# Altium PCB Grabber_DIOT.PCBDOC (part 6 of 7)
Units mm, origin at the board's own origin, x right, y up, seen from the top; angles counter-clockwise.
Board outline 221.14 x 100 mm, 4 copper layers (TopLayer, MidLayer1, Internal layer GND, Bottom Layer), stack 1.607 mm thick; 234 components, 170 nets, 1025 pads, 389 vias.
Unrouted connection lines stored in the file: 2.
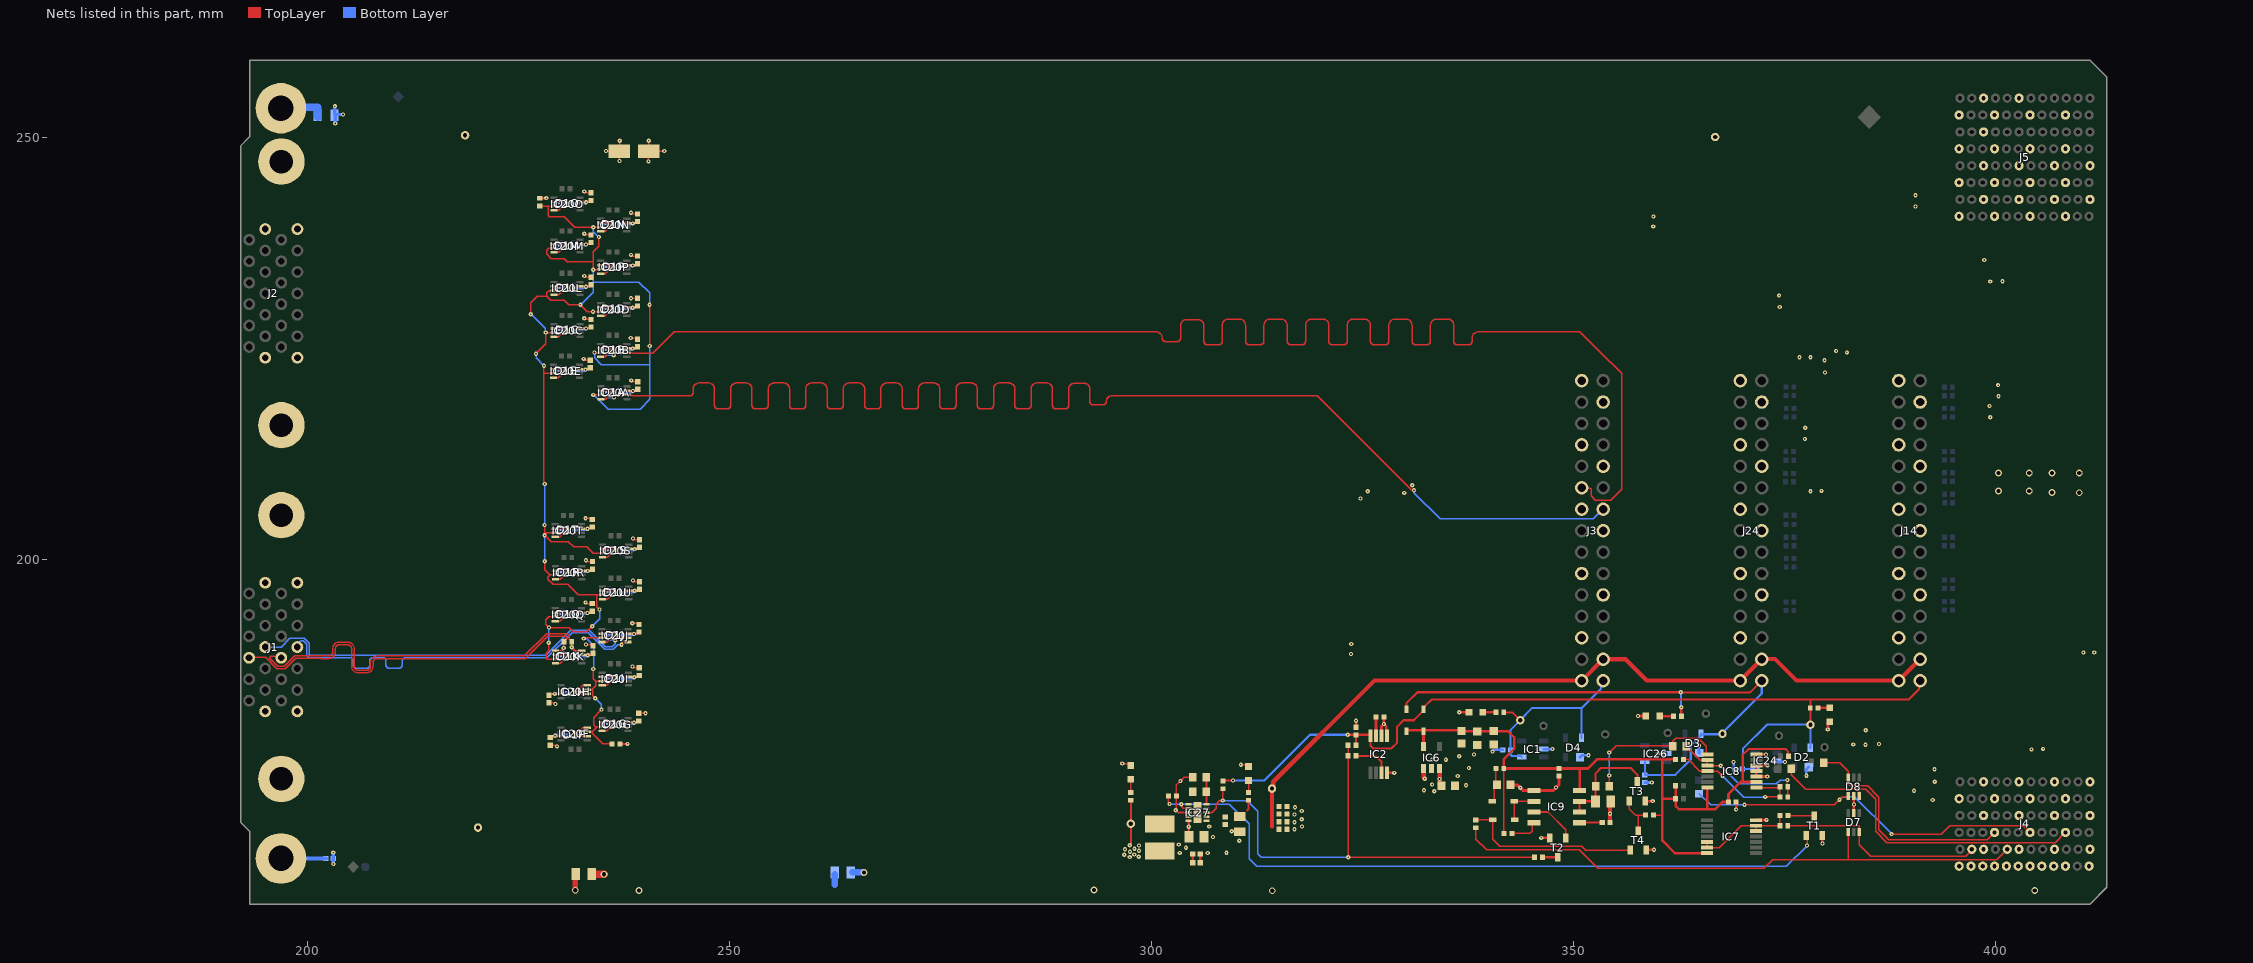
[diagram p7: the nets of this part, all layers, seen from the top]

## Via types
v1: diameter 0.5, hole 0.2, TopLayer to Bottom Layer, tented both sides, 374 vias
v2: diameter 0.8, hole 0.5, TopLayer to Bottom Layer, tented both sides, 15 vias

## Nets (pads, with @x,y where several pads share a name; then routed paths per layer and width w, separated by ;. In a path a pad name is that pad's centre, name@x,y a point inside that pad or via, vN(x,y) a via of type N, cw(c..) or ccw(c..) an arc to the next point about the centre after c; other vN are vias at no path point) (continued)
EEM_IO.LVDS_P19: D1B.1 IC20B.6 J3.11 | length 180.4
  TopLayer w0.152: v1(236.317,224.209) 236.317,224.278 236.556,224.517 IC20B.6@237.856,224.517 238.515,224.517 238.624,224.408 240.915,224.408 243.47,226.963 294.04,226.963 300.586,226.963 cw(c300.586,226.244) 301.305,226.244 ccw(c301.742,226.244) 301.742,225.807 303.053,225.807 ccw(c303.053,226.244) 303.49,226.244 303.49,227.7 cw(c304.209,227.7) 304.209,228.419 305.52,228.419 cw(c305.52,227.7) 306.239,227.7 306.239,225.876 ccw(c306.676,225.876) 306.676,225.439 307.987,225.439 ccw(c307.987,225.876) 308.424,225.876 308.424,227.768 cw(c309.143,227.768) 309.143,228.487 310.454,228.487 cw(c310.454,227.768) 311.173,227.768 311.173,225.876 ccw(c311.61,225.876) 311.61,225.439 312.92,225.439 ccw(c312.92,225.876) 313.357,225.876 313.357,227.768 cw(c314.077,227.768) 314.077,228.487 315.387,228.487 cw(c315.387,227.768) 316.107,227.768 316.107,225.876 ccw(c316.544,225.876) 316.544,225.439 317.854,225.439 ccw(c317.854,225.876) 318.291,225.876 318.291,227.768 cw(c319.01,227.768) 319.01,228.487 320.321,228.487 cw(c320.321,227.768) 321.041,227.768 321.041,225.876 ccw(c321.477,225.876) 321.477,225.439 322.788,225.439 ccw(c322.788,225.876) 323.225,225.876 323.225,227.768 cw(c323.944,227.768) 323.944,228.487 325.255,228.487 cw(c325.255,227.768) 325.974,227.768 325.974,225.876 ccw(c326.411,225.876) 326.411,225.439 327.722,225.439 ccw(c327.722,225.876) 328.159,225.876 328.159,227.768 cw(c328.878,227.768) 328.878,228.487 330.189,228.487 cw(c330.189,227.768) 330.908,227.768 330.908,225.876 ccw(c331.345,225.876) 331.345,225.439 332.656,225.439 ccw(c332.656,225.876) 333.092,225.876 333.092,227.768 cw(c333.812,227.768) 333.812,228.487 335.122,228.487 cw(c335.122,227.768) 335.842,227.768 335.842,225.876 ccw(c336.279,225.876) 336.279,225.439 337.589,225.439 ccw(c337.589,225.876) 338.026,225.876 338.026,226.244 cw(c338.746,226.244) 338.746,226.963 338.963,226.963 350.776,226.963 353.132,224.607 353.166,224.607 355.735,222.038 355.735,208.308 354.463,207.036 352.624,207.036 352.112,207.548 352.112,208.353 352.023,208.442 351.386,208.442 J3.11@351.246,208.582
  Bottom Layer w0.152: D1B.1@235.516,224.342 235.649,224.209 v1(236.317,224.209)
EEM_IO.LVDS_P20: D1A.1 IC20A.6 J3.14 | length 180.2
  TopLayer w0.152: v1(236.352,219.185) 236.352,219.254 236.591,219.493 IC20A.6@237.891,219.493 237.937,219.446 238.438,219.446 238.5,219.385 245.112,219.385 245.336,219.385 ccw(c245.336,219.771) 245.722,219.771 245.722,220.228 cw(c246.403,220.228) 246.403,220.909 247.561,220.909 cw(c247.561,220.228) 248.242,220.228 248.242,218.247 ccw(c248.628,218.247) 248.628,217.861 249.786,217.861 ccw(c249.786,218.247) 250.172,218.247 250.172,220.228 cw(c250.853,220.228) 250.853,220.909 252.011,220.909 cw(c252.011,220.228) 252.691,220.228 252.691,218.247 ccw(c253.077,218.247) 253.077,217.861 254.236,217.861 ccw(c254.236,218.247) 254.622,218.247 254.622,220.228 cw(c255.302,220.228) 255.302,220.909 256.461,220.909 cw(c256.461,220.228) 257.141,220.228 257.141,218.247 ccw(c257.527,218.247) 257.527,217.861 258.686,217.861 ccw(c258.686,218.247) 259.072,218.247 259.072,220.228 cw(c259.752,220.228) 259.752,220.909 260.91,220.909 cw(c260.91,220.228) 261.591,220.228 261.591,218.247 ccw(c261.977,218.247) 261.977,217.861 263.135,217.861 ccw(c263.135,218.247) 263.521,218.247 263.521,220.228 cw(c264.202,220.228) 264.202,220.909 265.36,220.909 cw(c265.36,220.228) 266.041,220.228 266.041,218.247 ccw(c266.427,218.247) 266.427,217.861 267.585,217.861 ccw(c267.585,218.247) 267.971,218.247 267.971,220.228 cw(c268.652,220.228) 268.652,220.909 269.81,220.909 cw(c269.81,220.228) 270.491,220.228 270.491,218.247 ccw(c270.877,218.247) 270.877,217.861 272.035,217.861 ccw(c272.035,218.247) 272.421,218.247 272.421,220.228 cw(c273.102,220.228) 273.102,220.909 274.26,220.909 cw(c274.26,220.228) 274.941,220.228 274.941,218.247 ccw(c275.327,218.247) 275.327,217.861 276.485,217.861 ccw(c276.485,218.247) 276.871,218.247 276.871,220.228 cw(c277.552,220.228) 277.552,220.909 278.71,220.909 cw(c278.71,220.228) 279.39,220.228 279.39,218.247 ccw(c279.777,218.247) 279.777,217.861 280.935,217.861 ccw(c280.935,218.247) 281.321,218.247 281.321,220.228 cw(c282.001,220.228) 282.001,220.909 283.16,220.909 cw(c283.16,220.228) 283.84,220.228 283.84,218.247 ccw(c284.226,218.247) 284.226,217.861 285.385,217.861 ccw(c285.385,218.247) 285.771,218.247 285.771,220.228 cw(c286.451,220.228) 286.451,220.909 287.61,220.909 cw(c287.61,220.228) 288.29,220.228 288.29,218.247 ccw(c288.676,218.247) 288.676,217.861 289.834,217.861 ccw(c289.834,218.247) 290.221,218.247 290.221,220.188 cw(c290.901,220.188) 290.901,220.868 292.059,220.868 cw(c292.059,220.188) 292.74,220.188 292.74,218.704 ccw(c293.126,218.704) 293.126,218.318 294.284,218.318 ccw(c294.284,218.704) 294.67,218.704 cw(c295.351,218.704) 295.351,219.385 297.388,219.385 319.662,219.385 330.804,208.243 330.998,208.243 v1@331.018,208.263
  Bottom Layer w0.152: D1A.1@235.551,219.318 235.684,219.185 v1(236.352,219.185) ; v1@331.178,208.072 331.169,208.063 331.169,207.864 334.219,204.814 352.39,204.814 353.529,205.952 J3.14@353.55,205.952
  other v1: 331.135,208.203
GND: B5.1 B7.1 B9.1 C1.2 C2.1 C3.1 C9.1 C10.1 C11.1 C12.1 C13.1 C14.1 C15.1 C16.1 C17.1 C47A.1 C47B.1 C47C.1 C47D.1 C47E.1 C47F.1 C47G.1 C47H.1 C47I.1 C47J.1 C47K.1 C47L.1 C47M.1 C47N.1 C47O.1 C47P.1 C47Q.1 C47R.1 C47S.1 C47T.1 C47U.1 C58.1 C59.1 C62.2 C64.1 C65.1 C66.1 C67.1 C68.1 D1A.2 D1B.2 D1C.2 D1D.2 D1E.2 D1F.2 D1G.2 D1H.2 D1I.2 D1J.2 D1K.2 D1L.2 D1M.2 D1N.2 D1O.2 D1P.2 D1Q.2 D1R.2 D1S.2 D1T.2 D1U.2 D2.1 D3.1 D4.1 D7.2 D8.2 IC1.2 IC2.4 IC2.5 IC2.6 IC6.2 IC7.7 IC8.3 IC8.4 IC8.5 IC8.7 IC9.1 IC20A.2 IC20A.4 IC20B.2 IC20B.4 IC20C.2 IC20C.4 IC20D.2 IC20D.4 IC20E.2 IC20E.4 IC20F.2 IC20F.4 IC20G.2 IC20G.4 IC20H.2 IC20H.4 IC20I.2 IC20I.4 IC20J.2 IC20J.4 IC20K.2 IC20K.4 IC20L.2 IC20L.4 IC20M.2 IC20M.4 IC20N.2 IC20N.4 IC20O.2 IC20O.4 IC20P.2 IC20P.4 IC20Q.2 IC20Q.4 IC20R.2 IC20R.4 IC20S.2 IC20S.4 IC20T.2 IC20T.4 IC20U.2 IC20U.4 IC24.2 IC26.2 IC27.1 IC27.6 IC27.11 J1.1 J1.13 J1.14 J1.26 J1.27 J1.28 J2.1 J2.13 J2.14 J2.26 J2.27 J2.28 J3.1 J3.4 J3.7 J3.10 J3.13 J3.16 J3.19 J3.22 J3.25 J4.A2 J4.A4 J4.A6 J4.C1 J4.C5 J4.D2 J4.D4 J4.D6 J4.F1 J4.F5 J4.G2 J4.G4 J4.G6 J4.I1 J4.I5 J4.J2 J4.J4 J4.J6 J4.L1 J4.L5 J5.A2 J5.A4 J5.C1 J5.C3 J5.C5 J5.C7 J5.D2 J5.D4 J5.F1 J5.F3 J5.F5 J5.F7 J5.G2 J5.G4 J5.G8 J5.I1 J5.I3 J5.I5 J5.I7 J5.J2 J5.J4 J5.J6 J5.J8 J5.L1 J5.L3 J5.L5 J5.L7 J14.1 J14.4 J14.7 J14.10 J14.13 J14.16 J14.19 J14.22 J14.25 J24.1 J24.4 J24.7 J24.10 J24.13 J24.16 J24.19 J24.22 J24.25 LD1.1 LD5.1 LD6.1 LD7.1 LD8.1 R5.2 R6.2 R68.1 R122.1 T1.2 T2.2 T3.2 T4.2 | length 154.4
  TopLayer w0.152: C47H.1@228.643,183.014 229.4,183.014 229.425,182.989 v1(229.425,182.865) ; C47F.1@228.799,177.999 229.556,177.999 229.581,177.974 v1(229.581,177.85) ; IC20E.4@229.166,221.542 229.716,221.542 v1(230.566,222.392) 230.488,222.392 230.303,222.576 229.201,222.576 IC20E.2@229.166,222.542 ; IC20C.4@229.231,226.367 229.781,226.367 v1(230.631,227.217) 230.556,227.217 230.368,227.405 229.269,227.405 IC20C.2@229.231,227.367 ; IC20L.4@229.231,231.367 229.781,231.367 v1(230.631,232.217) 230.481,232.367 IC20L.2@229.231,232.367 ; IC20M.4@229.231,236.374 229.781,236.374 v1(230.631,237.224) 230.537,237.224 230.349,237.412 229.269,237.412 IC20M.2@229.231,237.374 ; IC20O.4@229.231,241.367 229.781,241.367 v1(230.631,242.217) 230.559,242.217 230.368,242.408 229.272,242.408 IC20O.2@229.231,242.367 ; IC20Q.4@229.391,192.692 229.941,192.692 v1(230.791,193.542) 230.712,193.542 230.528,193.725 229.425,193.725 IC20Q.2@229.391,193.692 ; IC20T.4@229.391,202.666 229.941,202.666 v1(230.791,203.516) 230.716,203.516 230.528,203.704 229.429,203.704 IC20T.2@229.391,203.666 ; IC20K.4@229.426,187.693 229.976,187.693 v1(230.826,188.543) 230.735,188.543 230.563,188.715 229.448,188.715 IC20K.2@229.426,188.693 ; IC20R.4@229.426,197.675 229.976,197.675 v1(230.826,198.525) 230.75,198.525 230.563,198.711 229.463,198.711 IC20R.2@229.426,198.675 ; v1(232.759,223.766) 232.759,223.642 232.784,223.617 C47E.1@233.541,223.617 ; v1(232.824,228.591) 232.824,228.467 232.849,228.442 C47C.1@233.606,228.442 ; v1(232.824,233.591) 232.824,233.467 232.849,233.442 C47L.1@233.606,233.442 ; v1(232.824,238.598) 232.824,238.474 232.849,238.449 C47M.1@233.606,238.449 ; v1(232.824,243.591) 232.824,243.467 232.849,243.442 C47O.1@233.606,243.442 ; v1(232.984,194.916) 232.984,194.792 233.009,194.767 C47Q.1@233.766,194.767 ; v1(232.984,204.89) 233.616,204.89 C47T.1@233.766,204.741 ; v1(233.019,189.917) 233.043,189.892 233.676,189.892 C47K.1@233.801,189.768 ; v1(233.019,199.899) 233.019,199.775 233.044,199.75 C47R.1@233.801,199.75 ; IC20F.2@233.174,179.074 233.122,179.022 232.037,179.022 231.835,179.224 v1(231.774,179.224) 232.624,180.074 IC20F.4@233.174,180.074 ; IC20H.2@233.174,184.074 233.122,184.021 232.037,184.021 231.835,184.224 v1(231.774,184.224) 232.624,185.074 IC20H.4@233.174,185.074 ; IC20B.4@234.756,224.017 235.306,224.017 v1(236.156,224.867) 236.102,224.867 235.893,225.076 234.815,225.076 IC20B.2@234.756,225.017 ; IC20D.4@234.766,228.867 235.316,228.867 v1(236.166,229.717) 236.091,229.717 235.903,229.905 234.805,229.905 IC20D.2@234.766,229.867 ; IC20P.4@234.766,233.867 235.316,233.867 v1(236.166,234.717) 236.072,234.717 235.905,234.883 234.782,234.883 IC20P.2@234.766,234.867 ; IC20N.4@234.766,238.867 235.316,238.867 v1(236.166,239.717) 236.101,239.717 235.903,239.915 234.814,239.915 IC20N.2@234.766,239.867 ; IC20A.4@234.791,218.993 235.341,218.993 v1(236.191,219.843) 236.113,219.843 235.928,220.027 234.826,220.027 IC20A.2@234.791,219.993 ; IC20G.4@234.916,179.692 235.466,179.692 v1(236.316,180.542) 236.234,180.542 236.053,180.723 234.948,180.723 IC20G.2@234.916,180.692 ; IC20J.4@234.923,190.218 235.473,190.218 v1(236.323,191.068) 236.246,191.068 236.06,191.254 234.959,191.254 IC20J.2@234.923,191.218 ; IC20I.4@234.951,185.085 235.501,185.085 v1(236.351,185.935) 236.28,185.935 236.088,186.127 234.993,186.127 IC20I.2@234.951,186.085 ; IC20U.4@235.001,195.292 235.551,195.292 v1(236.401,196.142) 236.343,196.142 236.138,196.347 235.056,196.347 IC20U.2@235.001,196.292 ; IC20S.4@235.001,200.258 235.551,200.258 v1(236.401,201.108) 236.326,201.108 236.138,201.296 235.04,201.296 IC20S.2@235.001,201.258 ; v1(238.338,226.229) 238.993,226.229 C47B.1@239.131,226.092 ; v1(238.349,230.957) 238.576,230.957 238.591,230.942 C47D.1@239.141,230.942 ; v1(238.359,236.091) 238.359,235.967 238.384,235.942 C47P.1@239.141,235.942 ; v1(238.359,241.091) 238.359,240.967 238.384,240.942 C47N.1@239.141,240.942 ; v1(238.384,221.217) 238.384,221.093 238.409,221.068 C47A.1@239.166,221.068 ; v1(238.516,192.442) 239.149,192.442 C47J.1@239.298,192.293 ; v1(238.544,187.309) 238.544,187.185 238.569,187.16 C47I.1@239.326,187.16 ; v1(238.594,197.516) 238.594,197.392 238.619,197.367 C47U.1@239.376,197.367 ; v1(238.594,202.482) 238.594,202.358 238.619,202.333 C47S.1@239.376,202.333 ; C47G.1@239.291,181.767 239.299,181.775 v1(240.088,181.775) ; v1(240.423,247.169) C62.2@240.423,248.328 ; C62.2@240.466,248.413 v1(240.466,249.606) ; C62.2@240.487,248.392 v1(242.287,248.392) ; v1(296.563,175.813) 297.362,175.813 LD6.1@297.582,175.594 ; v1(310.626,175.685) 311.304,175.685 LD5.1@311.544,175.445
  TopLayer w0.305: C59.1@305.821,164.051 C65.1@305.821,165.115 ; C2.1@324.273,180.112 v1(324.274,180.876) ; IC2.6@327.282,179.107 327.289,179.114 327.289,180.239 327.558,180.508 v1(327.57,180.508) ; R68.1@327.57,181.318 v1(327.57,180.508) ; IC2.4@327.932,174.707 327.934,174.709 v1(328.787,174.709) ; IC2.5@327.932,179.107 327.859,179.18 327.859,180.232 327.583,180.508 v1(327.57,180.508) ; v1(336.501,181.893) 336.505,181.897 337.638,181.897 LD7.1@337.642,181.9 ; v1(346.207,167.007) T2.2@347.207,167.007 ; v1(357.68,181.459) 357.692,181.447 LD8.1@358.612,181.447 ; T3.2@358.574,171.365 v1(359.437,171.365) ; T4.2@358.657,165.557 358.712,165.612 v1(359.568,165.612) ; C17.1@369.27,171.245 369.307,171.207 v1(369.307,170.372) ; IC8.7@371.707,176.882 371.716,176.891 372.841,176.891 v1(372.85,176.9) ; v1(373.007,174.282) IC8.3@371.707,174.282 IC8.4@371.707,174.932 371.707,175.532 371.732,175.557 IC8.5@371.707,175.582 371.717,175.592 373.029,175.592 v1(373.039,175.602) ; T1.2@379.517,167.311 379.517,166.948 379.526,166.939 379.526,166.348 v1(379.535,166.338) ; D7.2@383.257,169.932 D8.2@383.257,171.957
  TopLayer w0.381: C15.1@342.558,173.281 343.388,173.281 344.063,172.606 347.606,172.606 348.333,173.333 C14.1@348.333,174.33 ; IC7.7@371.657,169.107 371.675,169.125 372.9,169.125 v1(372.918,169.142) ; v1(380.157,179.867) 380.157,179.899 380.198,179.94 380.198,180.567 LD1.1@380.407,180.777
  TopLayer w0.508: C16.1@354.357,168.807 354.364,168.814 v1(354.364,169.871) ; v1@354.359,169.876 354.359,171.209 C13.1@354.457,171.307
  Bottom Layer w0.152: D1E.2@229.926,222.367 230.541,222.367 v1(230.566,222.392) ; D1C.2@229.991,227.192 230.606,227.192 v1(230.631,227.217) ; D1L.2@229.991,232.192 230.606,232.192 v1(230.631,232.217) ; D1M.2@229.991,237.199 230.606,237.199 v1(230.631,237.224) ; D1O.2@229.991,242.192 230.606,242.192 v1(230.631,242.217) ; D1Q.2@230.151,193.517 230.766,193.517 v1(230.791,193.542) ; D1T.2@230.151,203.491 230.766,203.491 v1(230.791,203.516) ; D1K.2@230.186,188.518 230.801,188.518 v1(230.826,188.543) ; D1R.2@230.186,198.5 230.801,198.5 v1(230.826,198.525) ; v1(231.774,179.224) 231.799,179.249 D1F.2@232.414,179.249 ; v1(231.774,184.224) 231.799,184.249 D1H.2@232.414,184.249 ; D1B.2@235.516,224.842 236.131,224.842 v1(236.156,224.867) ; D1D.2@235.526,229.692 236.141,229.692 v1(236.166,229.717) ; D1P.2@235.526,234.692 236.141,234.692 v1(236.166,234.717) ; D1N.2@235.526,239.692 236.141,239.692 v1(236.166,239.717) ; D1A.2@235.551,219.818 236.166,219.818 v1(236.191,219.843) ; D1G.2@235.676,180.517 236.291,180.517 v1(236.316,180.542) ; D1J.2@235.683,191.043 236.298,191.043 v1(236.323,191.068) ; D1I.2@235.711,185.91 236.326,185.91 v1(236.351,185.935) ; D1U.2@235.761,196.117 236.376,196.117 v1(236.401,196.142) ; D1S.2@235.761,201.083 236.376,201.083 v1(236.401,201.108)
  Bottom Layer w0.305: v1(340.433,177.231) 340.635,177.433 C3.1@341.656,177.433 ; IC1.2@346.507,177.531 v1(347.532,177.531) ; D4.1@350.807,176.558 351.043,176.795 v1(351.807,176.795) ; C64.1@358.492,173.57 358.497,173.574 v1(359.317,173.574) ; v1(360.011,176.999) 360.014,177.002 361.088,177.002 IC26.2@361.092,177.006 ; v1(364.906,177.956) 364.906,177.117 D3.1@364.956,177.067 ; v1(369.004,175.992) 369.042,175.955 369.042,175.34 369.019,175.317 368.997,175.317 C58.1@369.132,175.182 ; IC24.2@374.143,176.133 374.23,176.046 375.066,176.046 v1(375.103,176.009) ; v1(377.631,174.371) 377.631,175.134 D2.1@377.892,175.395
  Bottom Layer w0.381: v1(203.087,165.261) C1.2@203.087,164.579 203.092,164.574 203.092,163.92 v1(203.097,163.915) ; R5.2@203.27,252.757 203.25,252.777 203.25,253.699 v1(203.27,253.719) ; v1(203.306,251.659) R5.2@203.306,252.71 ; R5.2@203.311,252.716 v1(204.227,252.716)
  Bottom Layer w0.762: R6.2@264.596,162.916 v2(265.963,162.916)
  other v1: 306.691,165.207 308.907,165.257 310.432,166.657 307.332,167.107 309.532,167.782 306.87,168.341 383.268,170.956 392.607,171.507 390.382,172.582 343.725,172.944 347.969,172.97 337.307,173.257 392.832,173.667 336.332,174.332 392.814,175.137 337.638,175.282 333.262,176.261 334.917,176.267 336.507,176.682 338.257,176.881 404.301,177.497 405.681,177.557 384.626,178.037 383.189,178.089 386.232,178.132 384.662,179.751 323.676,188.791 410.455,188.964 411.74,188.964 323.712,189.979 324.8,207.216 329.988,207.889 325.663,208.08 378.131,208.077 379.409,208.126 330.94,208.789 377.455,214.28 377.502,215.605 399.428,216.861 399.345,218.188 400.39,219.338 400.352,220.656 379.837,222.156 379.777,223.604 376.82,223.95 378.132,223.958 382.43,224.535 381.154,224.708 374.465,229.922 374.402,231.262 399.408,232.92 400.875,232.965 398.698,235.492 359.477,239.466 359.505,240.644 390.555,241.829 390.569,243.144
  other v2: 406.72,207.928 409.956,207.912 400.406,208.105 404.048,208.105 400.406,210.233 404.048,210.233 406.72,210.233 409.956,210.233
NetC13_2: C13.2 IC9.6 IC9.7 R62.2 T3.3 | length 12.9
  TopLayer w0.254: IC9.6@350.757,170.072 IC9.7@350.757,171.342 352.622,171.342 C13.2@352.657,171.307 352.657,174.657 353.282,175.282 356.807,175.282 357.607,174.482 T3.3@357.607,173.682
NetC15_2: C15.2 D9.1 R71.2 | length 4.2
  TopLayer w0.152: D9.1@340.433,171.349 340.459,171.349 340.633,171.523 340.633,172.956 C15.2@340.958,173.281 340.836,173.403 R71.2@340.836,175.231
NetC16_2: C16.2 IC9.5 | length 2.7
  TopLayer w0.254: IC9.5@350.757,168.802 350.772,168.817 353.442,168.817 C16.2@353.457,168.832
NetD6_2: D6.2 D9.2 IC9.2 | length 4.5
  TopLayer w0.152: D6.2@343.058,169.156 343.033,169.181 D9.2@343.033,171.349 343.04,171.342 IC9.2@345.357,171.342
NetD7_4: D7.4 J4.H2 R36.2 | length 70
  TopLayer w0.152: R36.2@338.467,168.21 338.467,166.847 339.732,165.582 350.732,165.582 352.932,163.382 371.507,163.382 372.607,163.382 373.657,164.432 382.63,164.432 400.207,164.432 J4.H2@401.432,165.657
  TopLayer w0.203: 382.607,164.456 D7.4@382.607,167.732
NetD7_6: D7.6 J4.K2 R46.2 | length 25
  TopLayer w0.152: R46.2@375.431,168.461 383.818,168.461 383.907,168.372 D7.6@383.907,167.732 383.924,167.716 383.924,166.197 385.284,164.836 396.501,164.836 397.232,165.568 J4.K2@397.232,165.657
NetD8_1: D8.1 J4.F3 R11.1 | length 44
  TopLayer w0.152: v1(370.288,170.936) 370.291,170.933 380.916,170.933 381.51,171.528 v1(381.568,171.528) ; v1@381.558,171.517 381.948,171.907 382.557,171.907 D8.1@382.607,171.957 ; v1(387.732,167.457) 393.613,167.457 394.598,168.443 403.347,168.443 J4.F3@404.132,167.657
  Bottom Layer w0.152: R11.1@364.907,172.257 364.957,172.257 366.279,170.936 v1(370.288,170.936) ; v1(381.568,171.528) 381.948,171.907 383.332,171.907 387.732,167.507 v1(387.732,167.457)
NetD8_3: D8.3 J4.C3 R10.1 | length 40
  TopLayer w0.152: R10.1@375.832,175.182 375.832,174.498 377.583,172.747 383.907,172.747 ; D8.3@383.907,171.957 383.907,172.747 ; J4.C3@408.332,167.657 407.127,166.452 387.156,166.452 385.828,167.78 385.828,171.592 384.673,172.747 383.907,172.747
NetD8_6: D8.6 J4.I3 R39.1 | length 27.4
  TopLayer w0.152: R39.1@379.782,175.907 381.607,175.907 382.607,174.907 D8.6@382.607,174.157 382.607,173.448 382.848,173.207 384.873,173.207 386.232,171.848 386.232,167.957 387.407,166.782 399.057,166.782 J4.I3@399.932,167.657
NetIC2_3: IC2.3 R67.1 | length 4.6
  TopLayer w0.254: R67.1@324.277,176.73 326.588,176.73 327.282,176.036 IC2.3@327.282,174.707
NetIC2_7: IC2.7 R68.2 | length 2.2
  TopLayer w0.305: R68.2@326.63,181.318 326.631,181.317 IC2.7@326.632,179.107 IC2.7@326.632,179.107
NetIC8_1: IC8.1 IC8.11 R50.1 R52.1 R53.1 | length 17
  TopLayer w0.152: 363.407,176.301 363.626,176.301 364.994,174.932 367.132,174.932 v1(367.682,174.382) ; IC8.1@371.707,172.982 371.722,172.967 374.397,172.967 R53.1@374.487,173.057 R52.1@374.487,171.85 R52.1@374.487,171.84 ; v1(372.768,171.867) 374.46,171.867 R52.1@374.487,171.84 ; R52.1@374.487,171.822 R52.1@374.487,171.84 ; R52.1@374.492,171.835 R52.1@374.487,171.84
  Bottom Layer w0.152: v1(367.682,174.382) 370.214,171.85 v1@372.768,171.85
NetIC8_8: IC8.8 R55.1 R62.1 | length 18.1
  TopLayer w0.152: v1(354.282,177.118) 355.097,177.932 361.732,177.932 R55.1@361.807,177.857 361.807,177.932 361.807,178.482 362.157,178.832 364.807,178.832 365.768,177.872 365.768,177.022 IC8.8@365.907,176.882
  TopLayer w0.203: R62.1@354.256,173.106 354.282,173.132 v1(354.282,174.407)
  Bottom Layer w0.203: v1(354.282,174.407) v1(354.282,177.118)
NetIC8_9: IC8.9 IC8.10 R52.2 R53.2 R55.2 | length 16.5
  TopLayer w0.152: R55.2@363.407,177.857 363.407,177.807 363.781,177.433 363.831,177.433 365.032,176.232 IC8.9@365.907,176.232 IC8.10@365.907,175.582 365.92,175.569 367.465,175.569 v1(367.479,175.556) ; v1(375.38,173.867) 375.368,173.855 375.368,173.116 R53.2@375.427,173.057 R52.2@375.427,171.85
  TopLayer w0.203: R52.2@375.564,172.035 R52.2@375.603,172.035
  Bottom Layer w0.152: v1(367.479,175.556) 369.627,173.407 374.075,173.407 374.534,173.867 v1(375.38,173.867)
NetIC9_4: IC9.4 R63.1 | length 3.6
  TopLayer w0.152: R63.1@342.756,167.532 344.872,167.532 345.147,167.807 345.147,168.592 IC9.4@345.357,168.802
NetIC27_5: IC27.5 R121.1 R122.2 | length 3.2
  TopLayer w0.254: R121.1@306.532,174.207 R122.2@306.532,172.499 306.54,172.491 IC27.5@306.54,171.015
NetIC27_9: IC27.9 L2.1
NetLD1_2: LD1.2 R7.2 | length 1.4
  TopLayer w0.254: R7.2@379.027,182.402 379.052,182.427 LD1.2@380.407,182.427
NetLD5_2: LD5.2 R1.1 | length 1.4
  TopLayer w0.152: R1.1@311.533,172.37 LD5.2@311.533,173.807
NetLD6_2: LD6.2 R2.2 | length 1.5
  TopLayer w0.152: R2.2@297.585,172.402 LD6.2@297.585,173.947
NetLD7_2: LD7.2 R3.2 | length 1.5
  TopLayer w0.254: LD7.2@339.292,181.9 R3.2@340.767,181.9
NetLD8_2: LD8.2 R4.2 | length 1.9
  TopLayer w0.152: LD8.2@360.018,181.447 LD8.2@360.262,181.447
  TopLayer w0.254: LD8.2@360.262,181.447 360.294,181.416 R4.2@361.875,181.416
NetR48_1: R48.1 T1.3 | length 3.1
  TopLayer w0.152: R48.1@375.438,169.649 378.529,169.649 T1.3@378.567,169.611
NetR61_2: R61.2 T2.3 | length 1.8
  TopLayer w0.305: R61.2@346.377,164.707 T2.3@348.157,164.707
NetR64_1: R64.1 T3.1 T4.3 | length 5
  TopLayer w0.203: T3.1@356.657,171.382 356.657,170.432 357.382,169.707 357.707,169.707 ; T4.3@357.707,167.857 357.707,169.707 ; R64.1@358.562,169.707 357.707,169.707
P3V3: B10.1 C47A.2 C47B.2 C47C.2 C47D.2 C47E.2 C47F.2 C47G.2 C47H.2 C47I.2 C47J.2 C47K.2 C47L.2 C47M.2 C47N.2 C47O.2 C47P.2 C47Q.2 C47R.2 C47S.2 C47T.2 C47U.2 C59.2 C62.1 C65.2 C66.2 D1A.5 D1B.5 D1C.5 D1D.5 D1E.5 D1F.5 D1G.5 D1H.5 D1I.5 D1J.5 D1K.5 D1L.5 D1M.5 D1N.5 D1O.5 D1P.5 D1Q.5 D1R.5 D1S.5 D1T.5 D1U.5 IC20A.7 IC20B.7 IC20C.7 IC20D.7 IC20E.7 IC20F.7 IC20G.7 IC20H.7 IC20I.7 IC20J.7 IC20K.7 IC20L.7 IC20M.7 IC20N.7 IC20O.7 IC20P.7 IC20Q.7 IC20R.7 IC20S.7 IC20T.7 IC20U.7 IC27.8 IC27.10 L2.2 R2.1 R8.1 R9.1 R65.2 R121.2 | length 82.2
  TopLayer w0.152: IC20C.7@232.331,227.367 232.332,227.368 233.028,227.368 v1(233.029,227.369) 233.428,227.369 233.431,227.367 C47C.2@233.606,227.542 ; v1(235.404,248.392) C62.1@236.987,248.392 v1(236.987,247.209) ; C62.1@237.024,248.428 v1(237.024,249.606)
  TopLayer w0.203: R65.2@302.977,171.957 302.951,171.931 302.951,170.327 v1(302.907,170.283) 302.907,170.276 303.174,170.009 IC27.8@304.434,170.009 ; R65.2@302.982,171.957 302.982,173.268 303.922,174.207 R121.2@304.932,174.207
  TopLayer w0.254: R8.1@227.543,242.803 228.291,242.803 v1(228.305,242.817) ; C47H.2@228.643,183.914 228.802,184.073 v1(229.327,184.073) IC20H.7@230.039,184.074 ; C47F.2@228.799,178.899 228.974,179.074 228.974,179.069 228.982,179.061 229.314,179.061 v1(229.361,179.108) 229.379,179.091 230.057,179.091 IC20F.7@230.074,179.074 ; IC20E.7@232.266,222.542 232.289,222.519 232.944,222.519 v1(232.967,222.496) 233.014,222.543 233.365,222.543 233.366,222.542 C47E.2@233.541,222.717 ; IC20L.7@232.331,232.367 232.354,232.344 233.009,232.344 v1(233.032,232.321) 233.079,232.368 233.43,232.368 233.431,232.367 C47L.2@233.606,232.542 ; IC20M.7@232.331,237.374 232.354,237.351 233.009,237.351 v1(233.032,237.328) 233.079,237.375 233.43,237.375 233.431,237.374 C47M.2@233.606,237.549 ; IC20O.7@232.331,242.367 232.348,242.349 233.026,242.349 v1(233.043,242.332) 233.09,242.379 233.423,242.379 233.431,242.371 233.431,242.367 C47O.2@233.606,242.542 ; IC20Q.7@232.491,193.692 233.591,193.692 C47Q.2@233.766,193.867 ; IC20T.7@232.491,203.666 232.508,203.648 233.186,203.648 v1(233.203,203.631) 233.25,203.678 233.583,203.678 233.591,203.67 233.591,203.666 C47T.2@233.766,203.841 ; IC20K.7@232.526,188.693 232.543,188.675 233.221,188.675 v1(233.238,188.658) 233.285,188.705 233.662,188.705 233.801,188.844 C47K.2@233.801,188.868 ; IC20R.7@232.526,198.675 232.543,198.657 233.221,198.657 v1(233.238,198.64) 233.285,198.687 233.618,198.687 233.626,198.679 233.626,198.675 C47R.2@233.801,198.85 ; R9.1@237.036,178.147 v1(237.957,178.147) ; IC20B.7@237.856,225.017 237.873,224.999 238.551,224.999 v1(238.568,224.982) 238.615,225.029 238.948,225.029 238.956,225.021 238.956,225.017 C47B.2@239.131,225.192 ; IC20D.7@237.866,229.867 237.883,229.849 238.561,229.849 v1(238.578,229.832) 238.625,229.879 238.958,229.879 238.966,229.871 238.966,229.867 C47D.2@239.141,230.042 ; IC20P.7@237.866,234.867 237.889,234.844 238.544,234.844 v1(238.567,234.821) 238.614,234.868 238.965,234.868 238.966,234.867 C47P.2@239.141,235.042 ; IC20N.7@237.866,239.867 237.889,239.844 238.544,239.844 v1(238.567,239.821) 238.614,239.868 238.965,239.868 238.966,239.867 C47N.2@239.141,240.042 ; IC20A.7@237.891,219.993 237.908,219.975 238.586,219.975 v1(238.603,219.958) 238.65,220.005 238.983,220.005 238.991,219.997 238.991,219.993 C47A.2@239.166,220.168 ; IC20G.7@238.016,180.692 238.039,180.669 238.694,180.669 v1(238.717,180.646) 238.764,180.693 239.115,180.693 239.116,180.692 C47G.2@239.291,180.867 ; IC20J.7@238.023,191.218 238.046,191.195 238.701,191.195 v1(238.724,191.172) 238.771,191.219 239.122,191.219 239.123,191.218 C47J.2@239.298,191.393 ; IC20I.7@238.051,186.085 238.074,186.062 238.729,186.062 v1(238.752,186.039) 238.799,186.086 239.15,186.086 239.151,186.085 C47I.2@239.326,186.26 ; IC20U.7@238.101,196.292 238.105,196.287 238.791,196.287 v1(238.795,196.283) 238.842,196.33 239.193,196.33 239.201,196.322 239.201,196.292 C47U.2@239.376,196.467 ; IC20S.7@238.101,201.258 238.118,201.24 238.796,201.24 v1(238.813,201.223) 238.86,201.27 239.193,201.27 239.201,201.262 239.201,201.258 C47S.2@239.376,201.433 ; v1(297.457,166.132) 297.457,166.199 297.585,166.327 R2.1@297.585,171.462 ; C59.2@304.921,164.051 C65.2@304.921,165.115
  TopLayer w0.305: C66.2@304.44,167.657 IC27.10@304.44,169.015
  TopLayer w0.381: C66.2@304.44,167.657 304.455,167.642 304.455,167.148 C66.2@304.471,167.133
  Bottom Layer w0.152: D1C.5@231.571,227.192 232.88,227.192 233.029,227.341 v1(233.029,227.369)
  Bottom Layer w0.254: v1(229.327,184.073) 229.374,184.121 229.957,184.121 230.085,184.249 D1H.5@230.834,184.249 ; v1(229.361,179.108) 229.502,179.249 D1F.5@230.834,179.249 ; D1E.5@231.506,222.367 232.838,222.367 v1(232.967,222.496) ; D1L.5@231.571,232.192 232.903,232.192 v1(233.032,232.321) ; D1M.5@231.571,237.199 232.903,237.199 v1(233.032,237.328) ; D1O.5@231.571,242.192 232.903,242.192 v1(233.043,242.332) ; D1Q.5@231.731,193.517 233.063,193.517 v1(233.203,193.657) ; D1T.5@231.731,203.491 233.063,203.491 v1(233.203,203.631) ; D1K.5@231.766,188.518 233.098,188.518 v1(233.238,188.658) ; D1R.5@231.766,198.5 233.098,198.5 v1(233.238,198.64) ; D1B.5@237.096,224.842 238.428,224.842 v1(238.568,224.982) ; D1D.5@237.106,229.692 238.438,229.692 v1(238.578,229.832) ; D1P.5@237.106,234.692 238.438,234.692 v1(238.567,234.821) ; D1N.5@237.106,239.692 238.438,239.692 v1(238.567,239.821) ; D1A.5@237.131,219.818 238.463,219.818 v1(238.603,219.958) ; D1G.5@237.256,180.517 238.588,180.517 v1(238.717,180.646) ; D1J.5@237.263,191.043 238.595,191.043 v1(238.724,191.172) ; D1I.5@237.291,185.91 238.623,185.91 v1(238.752,186.039) ; D1U.5@237.341,196.117 238.629,196.117 v1(238.795,196.283) ; D1S.5@237.341,201.083 238.673,201.083 v1(238.813,201.223)
  other v1: 297.457,164.732 298.532,164.782 296.807,165.007 297.982,165.032 303.382,165.232 297.482,165.357 298.557,165.482 296.886,165.671 298.007,165.732 304.107,165.832 298.557,166.107 303.257,166.232 304.44,168.336 303.456,173.742
P3V3_CPCIS: C10.2 C11.2 C12.2 C14.2 C17.2 D5.2 D10.2 IC6.5 IC7.14 IC8.2 IC8.14 IC9.8 R50.2 R51.1 R54.1 R60.1 R63.2 R64.2 R71.1 | length 94.4
  TopLayer w0.152: R71.1@341.776,175.231 341.776,167.572 R63.2@341.816,167.532
  TopLayer w0.203: R64.2@359.502,169.707 360.532,169.707 360.557,169.732
  TopLayer w0.254: 370.107,176.857 370.786,177.537 375.151,177.537 375.463,177.224 375.463,176.721 R60.1@375.502,176.682
  TopLayer w0.305: D10.2@330.234,179.752 336.697,179.752 C11.2@336.777,179.672 336.817,179.632 C10.2@338.657,179.632 338.682,179.657 C12.2@340.582,179.657 342.28,179.657 343.016,178.921 343.016,177.583 341.776,176.343 R71.1@341.776,175.231 ; IC6.5@332.264,177.851 D5.2@332.264,179.652 ; R71.1@341.777,175.231 C14.2@348.333,175.23 ; C14.2@348.333,175.23 350.757,175.23 ; IC9.8@350.757,172.612 350.757,175.23 ; 360.557,169.732 360.557,171.632 ; 360.564,169.732 360.564,166.676 362.032,165.207 IC7.14@365.857,165.207 ; 361.807,171.632 360.557,171.632 ; R54.1@362.137,173.189 R51.1@362.137,171.632 362.137,170.777 362.507,170.407 365.982,170.407 ; R50.2@362.25,176.301 R50.2@362.137,176.301 360.557,176.301 ; IC8.14@365.907,172.982 365.907,170.482 365.982,170.407 ; C17.2@368.407,171.257 367.707,171.257 366.857,170.407 365.982,170.407 ; C17.2@368.407,171.282 368.407,172.207 369.805,173.606 ; 369.827,173.627 IC8.2@371.702,173.627 ; 370.107,173.658 370.107,176.857 ; 350.757,175.23 351.729,175.23 352.801,176.301 360.557,176.301 ; 360.557,171.632 360.557,176.301
  TopLayer w0.508: C17.2@368.407,171.257 C17.2@368.407,171.282
P3V3_MP0: B16.1 C2.2 C58.2 D2.4 D5.1 IC2.8 IC24.4 J14.30 R7.1 R47.2 R66.2 | length 111.5
  TopLayer w0.254: R47.2@308.503,173.765 308.546,173.807 v1(309.698,173.807) v1@309.705,173.807 ; v1(323.275,179.232) 323.286,179.222 324.262,179.222 C2.2@324.273,179.211 ; C2.2@324.267,179.211 324.267,178.001 R66.2@324.277,177.991 ; C2.2@324.273,179.232 325.884,179.232 325.982,179.134 IC2.8@325.982,179.107 325.982,177.915 326.294,177.603 328.457,177.603 329.136,178.281 329.136,180.189 329.893,180.946 331.112,180.946 332.108,181.942 332.127,181.942 332.357,182.172 D5.1@332.357,182.265 ; D5.1@332.25,182.265 332.25,182.424 332.268,182.442 332.268,182.482 332.373,182.588 332.414,182.588 333.237,183.411 378.114,183.411 ; R7.1@378.087,182.402 378.111,182.378 B16.1@378.111,180.405 ; R7.1@378.114,182.402 378.114,183.411 ; J14.30@391.115,185.659 390.968,185.512 390.968,184.618 389.761,183.411 378.114,183.411
  Bottom Layer w0.254: v1(309.698,173.807) 313.382,173.807 318.807,179.232 v1(323.275,179.232) v1@323.282,179.232 ; C58.2@370.033,175.183 IC24.4@371.542,175.183 ; C58.2@370.107,175.257 370.107,177.574 372.975,180.442 378.062,180.442 B16.1@378.104,180.399 ; D2.4@378.092,177.695 378.111,177.714 B16.1@378.111,180.405
P3V3_MP1: B8.1 C64.2 D3.4 D10.1 IC26.4 J24.30 R4.1 | length 68.9
  TopLayer w0.254: D10.1@330.234,182.246 330.234,182.946 331.549,184.261 362.746,184.261 v1(362.754,184.253) 370.965,184.253 J24.30@372.345,185.632 ; R4.1@362.799,181.432 v1(362.799,182.5)
  Bottom Layer w0.254: IC26.4@358.492,176.056 C64.2@358.492,174.47 362.104,174.47 363.935,176.301 363.935,177.935 364.983,178.982 364.983,178.994 365.144,179.155 D3.4@365.156,179.155 ; v1@362.77,184.237 362.776,184.231 362.776,182.522 v1(362.799,182.5) v1@362.807,182.492 ; D3.4@365.156,179.167 D3.4@365.156,179.367 365.23,179.292 367.641,179.292 B8.1@367.689,179.341 367.689,179.465 372.345,184.12 J24.30@372.345,185.632
P3V3_MP2: B6.1 C3.2 D4.4 IC1.4 J3.30 R3.1 | length 24.1
  TopLayer w0.254: R3.1@341.776,181.886 342.785,181.886 B6.1@343.725,180.946
  Bottom Layer w0.254: B6.1@343.676,180.995 B6.1@343.725,180.946 342.556,179.777 C3.2@342.556,177.433 342.571,177.419 342.571,176.891 342.756,176.706 343.782,176.706 IC1.4@343.907,176.581 ; B6.1@343.725,180.975 345.166,182.416 350.983,182.416 350.997,182.402 ; D4.4@350.997,178.868 350.997,182.402 ; J3.30@353.55,185.632 353.308,185.39 353.308,184.713 350.997,182.402
P12V0: B11.1 C67.2 C68.2 IC27.2 J3.28 J3.29 J14.28 J14.29 J24.28 J24.29 R1.2 R56.1 R57.1 R58.1 R59.1 | length 93.4
  TopLayer w0.254: 311.332,170.232 311.532,170.432 R1.2@311.532,171.462
  TopLayer w0.305: C68.2@310.432,169.482 C68.2@310.482,169.532
  TopLayer w0.508: 314.311,168.355 B11.1@314.311,172.847 ; B11.1@314.43,173.104 314.463,173.137 314.463,173.666 326.455,185.658 J3.29@351.036,185.658 ; J3.29@351.01,185.632 J3.29@351.036,185.658 ; J14.29@388.549,185.633 J14.28@391.115,188.199 ; J14.29@388.554,185.654 376.452,185.654 373.909,188.198 372.345,188.198 369.805,185.658 358.712,185.658 356.197,188.172 J3.28@353.55,188.172 J3.29@351.036,185.658
P12V0_CPCIS: C9.2 IC6.1 IC6.3 J4.A1 J4.D1 J4.E1 J4.G1 J4.H1 J4.J1 J4.K1 R56.2 R57.2 R58.2 R59.2 | length 3.4
  TopLayer w0.508: IC6.1@332.282,175.232 332.282,174.135 v1(332.414,174.003) ; IC6.3@334.182,175.232 334.182,174.017 v1(334.157,173.991) 334.188,173.96 334.188,173.401 C9.2@334.382,173.207
  other v1: 316.982,168.032 317.857,168.357 316.982,168.857 317.832,169.207 316.982,169.782 317.832,170.199 317.032,170.632 333.53,172.532 332.325,172.645 333.284,173.334
PGOOD: IC27.7 R65.1 T1.1 | length 85.7
  TopLayer w0.152: R65.1@302.037,171.957 302.037,171.177 v1(302.182,171.032) ; v1(303.554,171.001) 303.62,170.934 303.62,170.714 303.82,170.515 IC27.7@304.44,170.515 ; v1(377.712,166.095) 377.712,167.612 T1.1@377.732,167.632
  Bottom Layer w0.152: v1(302.182,171.032) 302.276,171.032 302.292,171.016 303.538,171.016 v1(303.554,171.001) 309.264,171.001 311.607,168.657 311.607,164.557 312.507,163.657 375.273,163.657 v1(377.712,166.095)
PSU_EN: IC27.3 R47.1 R61.1 R66.1 R67.2 | length 60.2
  TopLayer w0.152: IC27.3@306.54,170.015 307.2,170.015 307.682,170.497 307.682,171.007 308.062,171.387 308.416,171.387 v1(308.482,171.454) 308.482,172.803 R47.1@308.503,172.825 ; R66.1@323.337,177.991 R67.2@323.337,176.73 v1(323.337,164.707) R61.1@345.437,164.707
  Bottom Layer w0.152: v1(308.482,171.454) 308.503,171.432 311.357,171.432 312.607,170.182 312.607,165.157 313.057,164.707 v1(323.337,164.707)
RST: IC9.3 T2.1 | length 5.6
  TopLayer w0.203: IC9.3@345.357,170.072 347.017,170.072 349.107,167.982 T2.1@349.107,167.007
RST_N: D6.1 R36.1 T4.1 | length 21.1
  TopLayer w0.152: R36.1@338.467,169.15 340.452,169.15 D6.1@340.458,169.156 340.458,166.861 341.311,166.007 351.032,166.007 351.482,165.557 T4.1@356.757,165.557
RX_EN: IC20A.3 IC20B.3 IC20C.3 IC20D.3 IC20E.3 IC20K.3 IC20L.3 IC20M.3 IC20N.3 IC20O.3 IC20P.3 IC20Q.3 IC20R.3 IC20S.3 IC20T.3 IC20U.3 R8.2 | length 146.8
  TopLayer w0.152: v1@226.501,229.071 226.501,230.441 227.258,231.197 228.378,231.197 ; v1(227.098,224.379) 228.271,225.552 v1(228.271,226.892) 228.284,226.879 229.218,226.879 IC20C.3@229.231,226.867 ; R8.2@227.546,241.867 228.55,241.867 ; v1(228.051,222.953) 228.051,222.042 ; v1(228.125,202.87) v1@228.211,202.87 ; v1(228.125,204.072) 228.125,203.03 v1@228.223,202.932 ; v1(228.128,208.934) 228.061,209.001 228.061,209.187 228.051,209.197 228.051,222.042 ; v1(228.131,199.788) 228.131,198.768 228.724,198.175 228.816,198.175 ; v1@228.261,202.911 v1@228.261,202.895 ; v1(228.614,190.136) 228.614,189.178 228.299,188.863 228.299,188.282 228.388,188.193 IC20K.3@229.426,188.193 ; IC20E.3@229.166,222.042 228.051,222.042 ; IC20L.3@229.231,231.867 228.682,231.867 228.405,231.589 228.405,231.197 228.378,231.197 ; IC20M.3@229.231,236.874 228.596,236.874 228.369,236.647 228.369,236.207 228.922,235.655 230.461,235.655 230.818,235.297 233.893,235.297 ; IC20O.3@229.231,241.867 228.55,241.867 ; IC20Q.3@229.391,193.192 228.643,193.192 228.279,192.828 228.279,192.298 v1(228.643,191.934) 231.053,191.934 231.531,191.457 233.131,191.457 v1(233.766,192.092) ; IC20T.3@229.391,203.166 228.456,203.166 v1@228.223,202.932 ; IC20R.3@229.426,198.175 228.816,198.175 ; v1(233.893,219.498) 233.899,219.493 IC20A.3@234.791,219.493 ; v1(234.045,224.517) IC20B.3@234.756,224.517 ; v1(234.553,238.199) 234.553,237.101 233.893,236.44 233.893,235.297 ; v1(234.629,194.073) 234.305,194.398 234.305,195.735 234.248,195.792 ; IC20D.3@234.753,229.354 v1(233.867,229.354) 233.2,229.354 v1(232.363,230.191) 232.344,230.171 230.966,230.171 230.439,230.698 228.877,230.698 228.378,231.197 ; IC20P.3@234.766,234.367 234.731,234.332 v1(233.893,234.332) 233.893,235.297 ; IC20N.3@234.766,239.367 233.898,239.367 v1(233.893,239.361) 231.679,239.361 230.435,240.606 228.686,240.606 228.531,240.761 228.531,241.848 228.55,241.867 ; IC20U.3@235.001,195.792 234.248,195.792 ; IC20S.3@235.001,200.758 233.888,200.758 233.131,201.515 231.556,201.515 230.946,202.125 228.91,202.125 228.211,202.824 v1@228.211,202.87 ; v1(240.566,230.192) 240.566,225.299 v1(240.568,225.297) ; v1@228.211,202.87 228.211,202.92 v1@228.223,202.932 ; v1@228.211,202.87 228.261,202.87 v1@228.261,202.895 ; v1@228.223,202.932 v1@228.261,202.895 ; 228.816,198.175 228.508,197.867 228.508,197.654 229.118,197.045 230.87,197.045 232.123,195.792 234.248,195.792
  Bottom Layer w0.152: v1(226.491,229.06) 226.523,229.06 228.213,227.37 228.213,226.949 v1(228.271,226.892) ; v1(227.098,224.379) 227.103,224.374 227.103,223.9 v1(228.051,222.953) ; v1(228.125,202.87) 228.125,202.19 228.131,202.184 v1(228.131,199.788) ; v1(228.125,204.072) 228.125,205.227 228.128,205.229 v1(228.128,208.934) ; v1(228.614,190.136) 228.628,190.15 228.628,191.92 v1(228.643,191.934) ; v1(232.363,230.191) 232.418,230.191 233.894,231.666 233.894,232.873 ; v1(233.766,192.092) 234.629,192.955 v1(234.629,194.073) ; v1(233.893,219.498) 233.969,219.498 235.645,217.822 239.43,217.822 240.568,218.961 240.568,223.162 240.573,223.162 240.573,225.292 v1(240.568,225.297) ; v1(233.893,239.361) 233.893,238.859 v1(234.553,238.199) ; v1@233.894,234.331 233.894,232.873 ; v1(234.045,224.517) 234.045,223.872 234.827,223.09 240.568,223.09 ; v1(240.566,230.192) 240.566,231.575 239.289,232.852 233.916,232.852 233.894,232.873
SERRX_N: D1K.3 IC20K.1 J1.19 R131K.1 | length 48
  TopLayer w0.152: J1.19@193.111,188.349 193.153,188.391 195.052,188.391 196.374,187.069 197.405,187.069 197.569,187.232 198.629,188.293 201.438,188.293 201.449,188.282 201.575,188.282 201.595,188.262 202.539,188.262 ccw(c202.539,189.049) 203.326,189.049 203.326,189.426 cw(c203.809,189.426) 203.809,189.909 204.774,189.909 cw(c204.774,189.426) 205.256,189.426 205.256,187.356 ccw(c206.044,187.356) 206.044,186.569 207.009,186.569 ccw(c207.009,187.356) 207.796,187.356 207.796,187.779 cw(c208.279,187.779) 208.279,188.262 208.508,188.262 225.858,188.262 228.514,190.918 230.629,190.918 230.719,190.829 230.719,190.58 230.401,190.263 v1(230.401,189.518) 230.076,189.193 IC20K.1@229.426,189.193
  Bottom Layer w0.152: D1K.3@230.186,189.018 230.186,189.303 v1(230.401,189.518)
SERRX_P: D1K.4 IC20K.8 J1.6 R131K.2 | length 47.8
  TopLayer w0.152: J1.6@196.921,188.349 196.765,188.505 195.654,188.505 195.564,188.416 195.564,188.29 196.506,187.348 197.29,187.348 198.513,188.572 198.619,188.572 198.623,188.576 201.555,188.576 201.565,188.566 201.595,188.566 202.539,188.566 ccw(c202.539,189.049) 203.021,189.049 203.021,189.426 cw(c203.809,189.426) 203.809,190.214 204.774,190.214 cw(c204.774,189.426) 205.561,189.426 205.561,187.356 ccw(c206.044,187.356) 206.044,186.874 207.009,186.874 ccw(c207.009,187.356) 207.492,187.356 207.492,187.779 cw(c208.279,187.779) 208.279,188.566 208.508,188.566 225.731,188.566 228.388,191.223 230.755,191.223 231.023,190.955 231.023,190.566 231.113,190.476 231.127,190.476 231.341,190.263 v1(231.341,189.597) 231.745,189.193 IC20K.8@232.526,189.193
  Bottom Layer w0.152: v1(231.341,189.597) 231.576,189.362 231.576,189.208 D1K.4@231.766,189.018
SERTX_N: D1J.6 IC20J.5 J1.7 | length 48
  TopLayer w0.152: v1(237.246,189.902) 237.246,190.115 237.348,190.218 IC20J.5@238.023,190.218
  Bottom Layer w0.152: J1.7@198.826,189.756 198.826,189.886 199.286,190.346 199.529,190.346 199.93,189.944 199.93,188.621 200.198,188.353 203.071,188.353 205.077,188.353 cw(c205.077,187.967) 205.464,187.967 205.464,187.494 ccw(c205.85,187.494) 205.85,187.108 207.008,187.108 ccw(c207.008,187.494) 207.394,187.494 207.394,187.993 cw(c207.78,187.993) 207.78,188.379 208.938,188.379 cw(c208.938,187.993) 209.324,187.993 209.324,187.5 ccw(c209.71,187.5) 209.71,187.114 210.869,187.114 ccw(c210.869,187.5) 211.255,187.5 211.255,187.967 cw(c211.641,187.967) 211.641,188.353 213.575,188.353 228.393,188.353 231.194,191.154 231.369,191.33 233.278,191.33 235.228,189.38 236.262,189.38 236.783,189.901 v1(237.246,189.902) ; v1(237.246,189.902) 237.263,189.919 D1J.6@237.263,190.543
SERTX_P: D1J.1 IC20J.6 J1.20 | length 48.6
  TopLayer w0.152: v1(236.484,190.41) 236.484,190.479 236.723,190.718 IC20J.6@238.023,190.718
  Bottom Layer w0.152: J1.20@195.016,189.619 196.9,189.619 197.931,190.651 199.655,190.651 200.235,190.071 200.235,188.747 200.324,188.658 203.071,188.658 209.744,188.658 213.575,188.658 215.385,188.658 228.266,188.658 230.889,191.281 231.243,191.635 233.384,191.635 235.334,189.685 236.136,189.685 236.486,190.035 236.486,190.407 v1(236.484,190.41) 235.816,190.41 D1J.1@235.683,190.543
SERVMOD_3V3: IC7.5 IC7.6 IC7.12 IC7.13 R46.1 R48.2 | length 12.9
  TopLayer w0.152: IC7.12@365.857,166.507 IC7.13@365.857,165.857 367.307,165.857 369.907,168.457 IC7.6@371.657,168.457 IC7.5@371.657,167.807 372.157,167.807 IC7.5@372.28,167.931
  TopLayer w0.203: IC7.6@371.657,168.457 R46.1@374.487,168.457 R48.2@374.487,169.649
STRIP1: C1.1 M3.1 M4.1 R5.1 R49.2 | length 12.7
  TopLayer w0.7: v2(231.759,160.791) R49.2@231.759,162.725
  Bottom Layer w0.5: M3.1@196.889,164.579 C1.1@202.187,164.579
  Bottom Layer w0.9: M4.1@196.921,253.594 201.234,253.594 201.237,253.59 R5.1@201.237,252.429
STRIP2: R6.1 | length 1.2
  Bottom Layer w0.762: 262.497,161.467 R6.1@262.497,162.716
  other v2: 239.31,160.781 293.235,160.831
STRIP3: R49.1 | length 1.4
  TopLayer w0.9: R49.1@233.71,162.692 v2(235.16,162.692)
  other v2: 314.335,160.756 404.699,160.776
TX_EN: IC20F.3 IC20G.3 IC20H.3 IC20I.3 IC20J.3 R9.2 | length 21.2
  TopLayer w0.152: v1(232.759,190.619) 232.858,190.718 IC20J.3@234.923,190.718 ; IC20F.3@233.174,179.574 233.764,179.574 ; IC20H.3@233.174,184.574 233.715,184.574 ; v1(233.893,187.012) 233.893,185.869 234.177,185.585 ; v1(234.121,183.559) 233.828,183.852 233.828,184.431 233.715,184.543 233.715,184.574 ; v1(234.858,182.206) 233.918,181.266 233.918,180.408 234.134,180.192 234.382,180.192 ; IC20G.3@234.916,180.192 234.382,180.192 ; IC20I.3@234.951,185.585 234.177,185.585 ; R9.2@236.096,178.147 235.036,178.147 233.764,179.419 233.764,179.574 ; 233.715,184.574 234.177,185.035 234.177,185.585 ; 233.764,179.574 234.382,180.192
  Bottom Layer w0.152: v1(232.759,190.619) 232.772,190.605 233.118,190.605 233.944,189.779 233.944,187.063 v1(233.893,187.012) ; v1(234.121,183.559) 234.858,182.822 v1(234.858,182.206)